# Altium PCB ZJ-20260608.PcbDoc
Units mm, origin at the board's own origin, x right, y up, seen from the top; angles counter-clockwise.
Board outline 152.4 x 101.6 mm, 2 copper layers (Top Layer, Bottom Layer); 58 components, 0 nets, 229 pads, 193 vias.
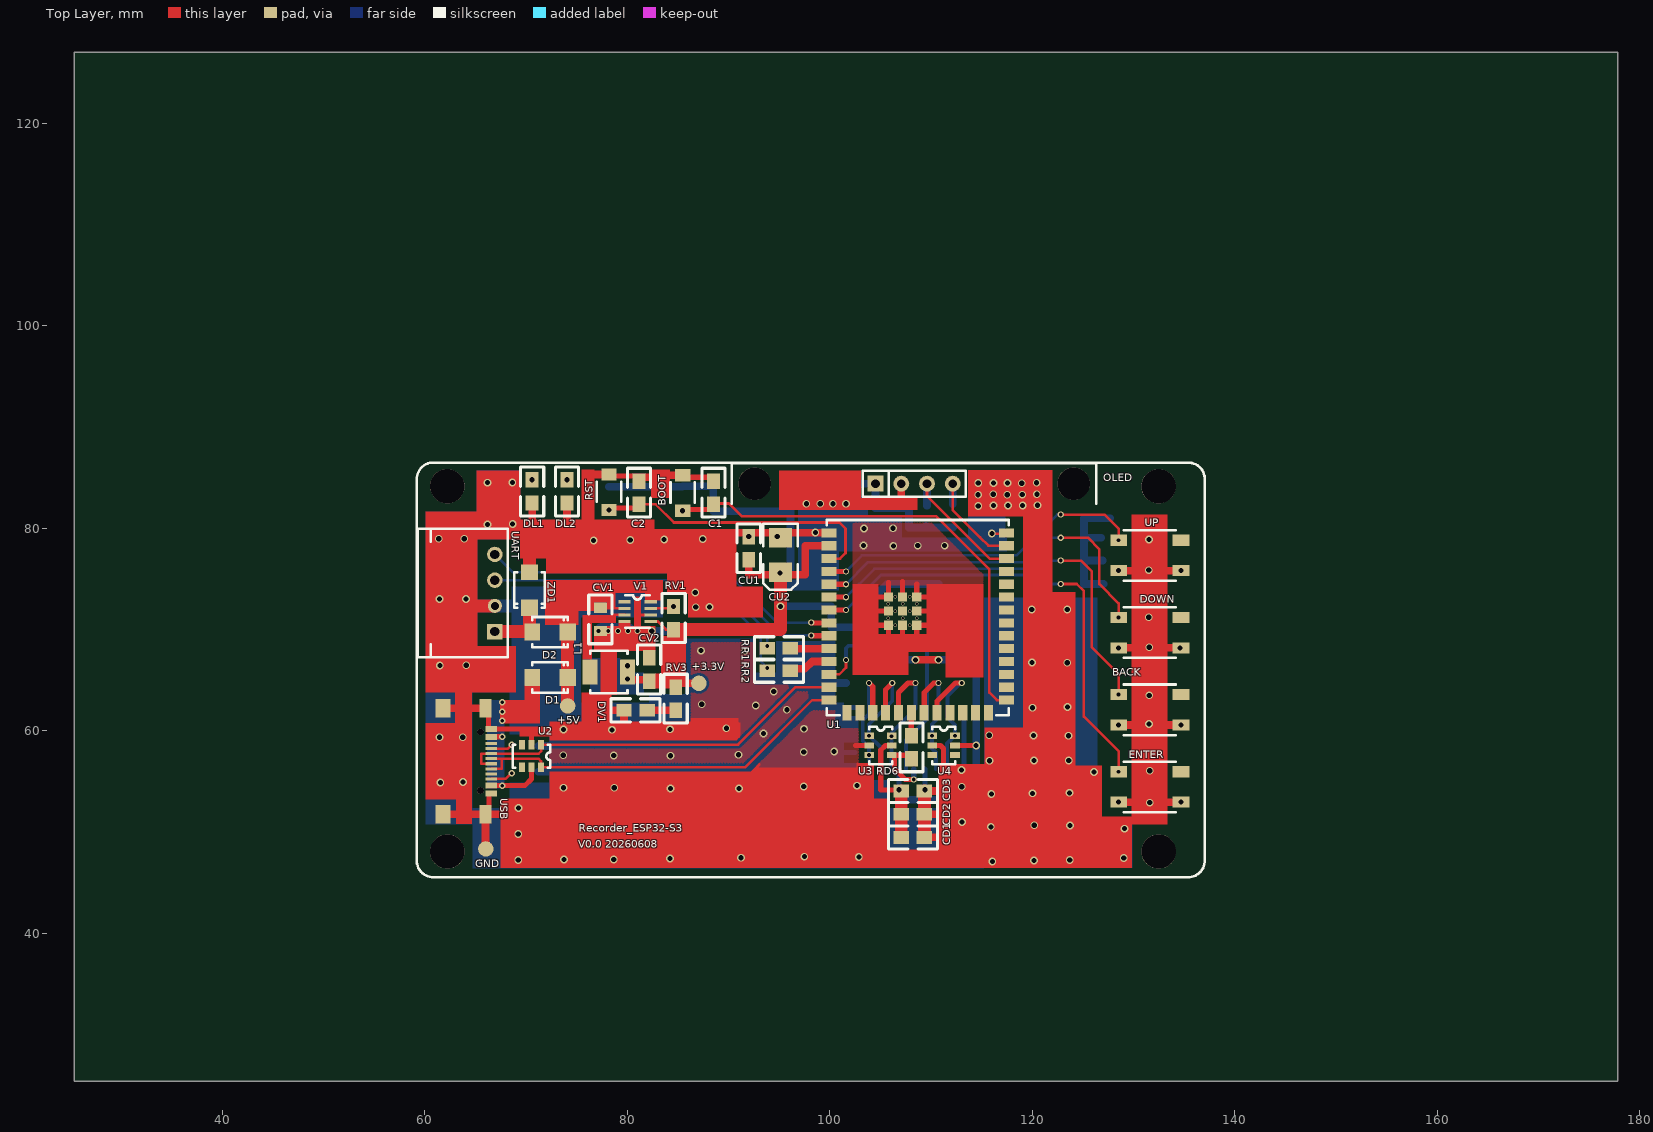
[diagram p0: Top Layer view]
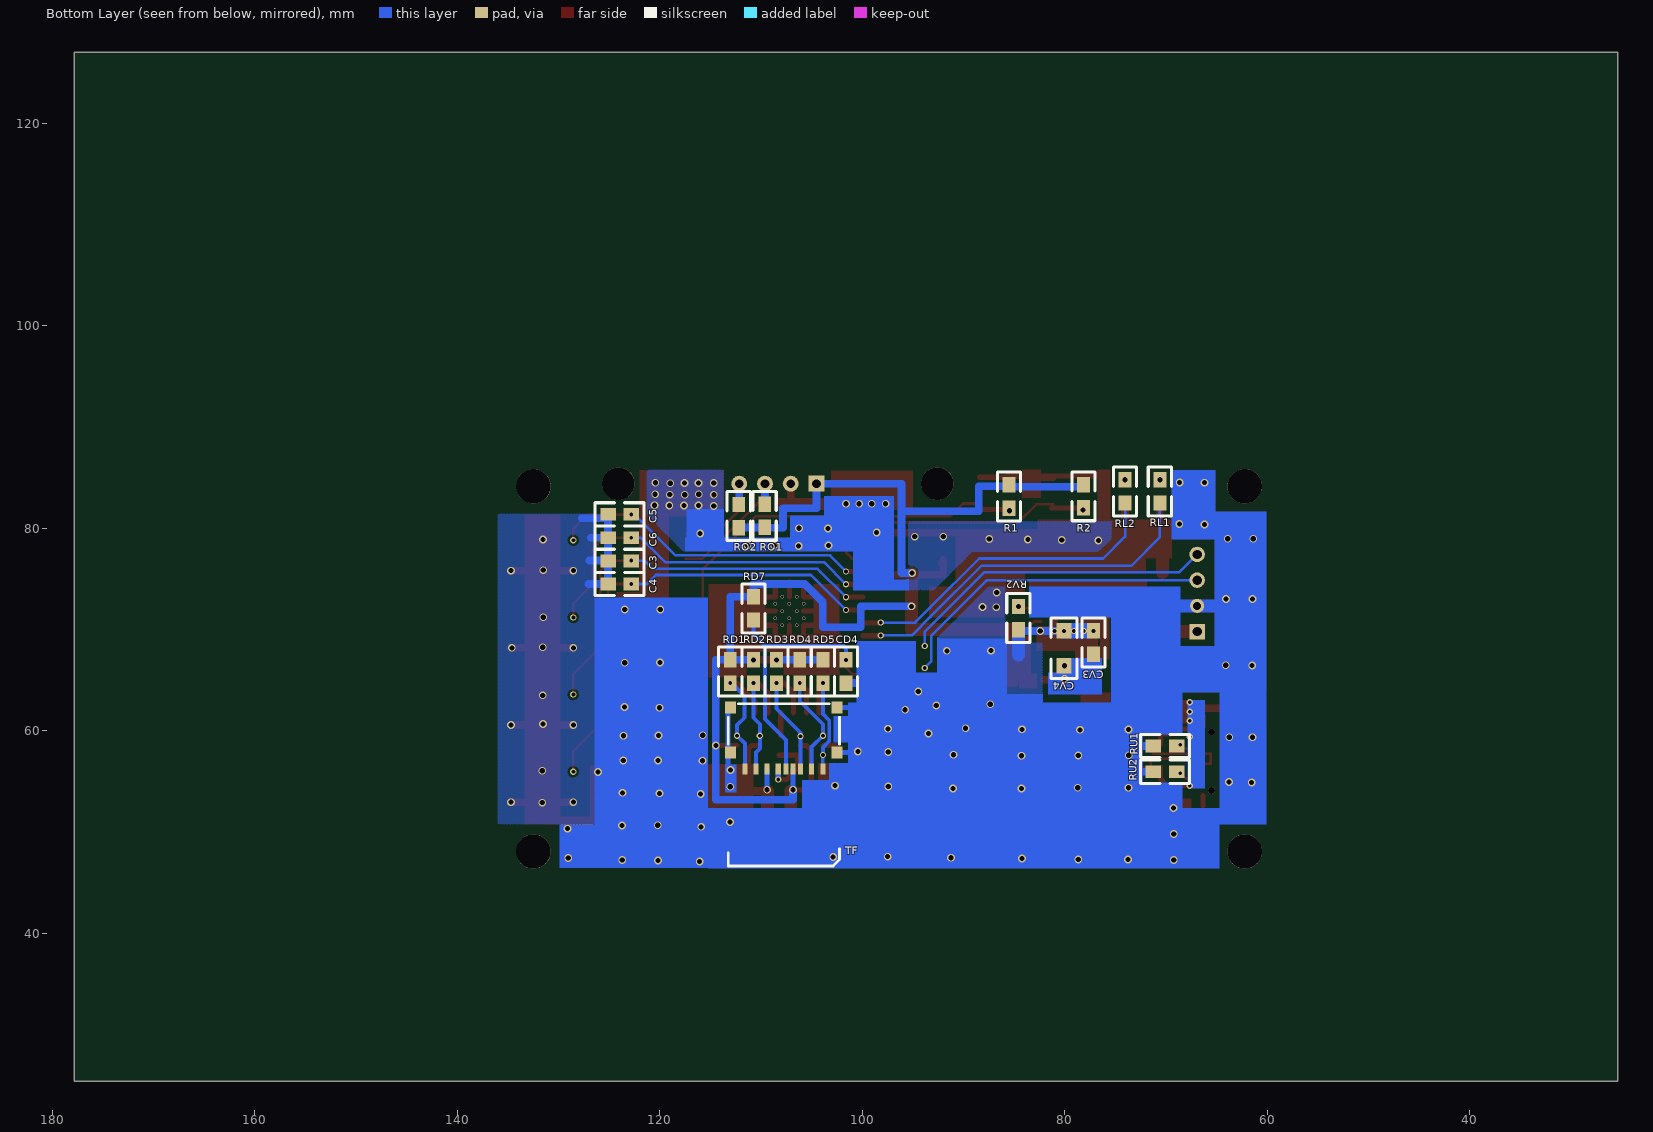
[diagram p1: Bottom Layer view, seen from below]

## Layer stack, top to bottom
Top Solder: solder mask 0.0102, Solder Resist, Dk 3.5
Top Layer: signal copper 0.0356
Dielectric 1: dielectric 0.32, FR-4, Dk 4.8
Bottom Layer: signal copper 0.0356
Bottom Solder: solder mask 0.0102, Solder Resist, Dk 3.5

## Board outline
25.4,25.4 177.8,25.4 177.8,127 25.4,127

## Design rules (kind name [scope] priority, off if disabled: settings)
Clearance [All] p1: gap=0.254
PolygonConnect [All] p1: connectstyle=Relief reliefconductorwidth=0.254 reliefentries=4 polygonreliefangle="90 Angle" airgapwidth=0.254
RoutingVias [All] p1: holewidth=0.711 width=1.27 viastyle="Through Hole" minholewidth=0.711 minwidth=1.27 maxholewidth=0.711 maxwidth=1.27
SolderMaskExpansion [All] p1: expansion=0.102
Width [All] p1: maxlimit=0.254 minlimit=0.254 preferedwidth=0.254
30 further rules are at their usual default settings.

## Components (designator, comment, footprint, x,y, rotation, side; value= is the part's Value field where it differs from the comment)
BACK "Comment" SW-4.5*4.5 128.524,63.576 r0 top
BOOT "Comment" SW-3*4 85.471,85.237 r270 top
C1 "Comment" 0805#1 88.519,84.658 r270 top
C2 "Comment" 0805#1 81.153,84.658 r270 top
C3 "Comment" 0805#1 125.095,76.784 r180 bottom
C4 "Comment" 0805#1 125.095,74.498 r180 bottom
C5 "Comment" 0805#1 125.095,81.382 r180 bottom
C6 "Comment" 0805#1 125.095,79.07 r180 bottom
CD1 "Comment" 0805#2 107.061,49.479 r0 top
CD2 "Comment" 0805#3 107.061,51.765 r0 top
CD3 "Comment" 0805#3 107.061,54.051 r0 top
CD4 "Comment" 0805#4 101.6,67.005 r270 bottom
CU1 "Comment" 0805#3 91.999,79.172 r270 top
CU2 "Comment" B-3528 95.123,75.65 r90 top
CV1 "Comment" 0805#5 77.343,69.866 r90 top
CV2 "Comment" 0805#3 82.169,64.913 r90 top
CV3 "Comment" 0805#3 77.156,67.58 r90 bottom
CV4 "Comment" 1206 80.077,66.437 r90 bottom
D1 "Comment" SMA#1 74.117,65.278 r180 top
D2 "Comment" SMA#1 74.117,69.743 r180 top
DL1 "Comment" 0805#4 70.612,84.785 r270 top
DL2 "Comment" 0805#4 74.041,84.785 r270 top
DOWN "Comment" SW-4.5*4.5 128.524,71.196 r0 top
DV1 "Comment" 0805#4 81.966,62.027 r180 top
ENTER "Comment" SW-4.5*4.5 128.524,55.956 r0 top
L1 "Comment" 0420 80.027,65.802 r180 top
OLED "Comment" OLED-1.3-IIC 108.329,84.404 r0 top
R1 "Comment" 0805#6 85.496,81.991 r90 bottom
R2 "Comment" 0805#6 78.156,82.017 r90 bottom
RD1 "Comment" 0805#3 113.03,67.005 r270 bottom
RD2 "Comment" 0805#3 110.744,67.005 r270 bottom
RD3 "Comment" 0805#3 108.458,67.005 r270 bottom
RD4 "Comment" 0805#3 106.172,67.005 r270 bottom
RD5 "Comment" 0805#3 103.886,67.005 r270 bottom
RD6 "Comment" 0805#3 108.077,59.512 r270 top
RD7 "Comment" 0805#7 110.744,73.228 r270 bottom
RL1 "Comment" 0805#3 70.612,84.785 r270 bottom
RL2 "Comment" 0805#3 74.041,84.785 r270 bottom
RO1 "Comment" 0805#3 109.626,82.372 r270 bottom
RO2 "Comment" 0805#3 112.192,82.347 r270 bottom
RR1 "Comment" 0805#3 96.114,68.148 r180 top
RR2 "Comment" 0805#3 96.114,65.938 r180 top
RST "Comment" SW-3*4 78.207,85.313 r270 top
RU1 "Comment" 0805#1 71.247,58.496 r180 bottom
RU2 "Comment" 0805#1 71.247,55.956 r180 bottom
RV1 "Comment" 0805#3 84.582,69.993 r90 top
RV2 "Comment" 0805#3 84.582,69.993 r90 bottom
RV3 "Comment" 0805#3 84.785,64.313 r270 top
TF "Comment" "TF Card" 107.739,57.856 r0 bottom
U1 "Comment" "ESP32-S3 module" 99.185,79.548 r0 top
U2 "Comment" "TSOP-6 SRV05-4" 71.496,58.638 r270 top
U3 "Comment" "TSOP-6 SRV05-4" 103.886,59.512 r0 top
U4 "Comment" "TSOP-6 SRV05-4" 110.109,59.512 r0 top
UART "Comment" XH2.54W-4P 66.929,69.799 r90 top
UP "Comment" SW-4.5*4.5 128.524,78.816 r0 top
USB "Comment" "TYPE-C USB T" 65.507,56.998 r270 top
V1 "Comment" TSOT23-8 81.026,71.771 r0 top
ZD1 "Comment" SMA#2 70.358,72.161 r90 top

## Footprints (in the part's own frame and the unit in brackets; to place one, negate y for a bottom-side part, rotate by r counter-clockwise, add the part's x,y. Pads: shape width x height; smd on the part's side, far side on the other; paste and mask are expansions set on the pad)
0420 [mm]
  rect 1.5x2.5 smd paste+0 mask+0.051: 1(0,0) 2(3.7,0)
  silkscreen extent 0,-2.1 3.7,2.1
0805#1 [mil]
  rect 60x50 smd: 2(90,0) GND(0,0)
  silkscreen extent -50,-45 140,45
0805#2 [mil]
  rect 60x50 smd: +3.3V(0,0) GND(90,0)
  silkscreen extent -50,-45 140,45
0805#3 [mil]
  rect 60x50 smd: 1(0,0) 2(90,0)
  silkscreen extent -50,-45 140,45
0805#4 [mil]
  rect 60x50 smd: 1(0,0) GND(90,0)
  silkscreen extent -50,-45 140,45
0805#5 [mil]
  rect 40x50 smd: 1(0,0) 2(90,0)
  silkscreen extent -50,-45 140,45
0805#6 [mil]
  rect 60x50 smd: 1(0,0) +3.3V(90,0)
  silkscreen extent -50,-45 140,45
0805#7 [mil]
  rect 60x50 smd: 2(90,0) +3.3V(0,0)
  silkscreen extent -50,-45 140,45
1206 [mil]
  rect 60x60 smd: 1(0,0) GND(135,0)
  silkscreen extent -50,-50 185,50
B-3528 [mm]
  rect 1.9x2.28 smd paste+0 mask+0.051: 1(0,0) 2(3.42,0)
  silkscreen extent -1.7,-1.7 4.8,1.7
"ESP32-S3 module" [mm]
  rect 1.5x0.9 smd paste+0 mask+0.051: 1(0.75,0) 2(0.75,-1.27) 3(0.75,-2.54) 4(0.75,-3.81) 5(0.75,-5.08) 6(0.75,-6.35) 7(0.75,-7.62) 8(0.75,-8.89) 9(0.75,-10.16) 10(0.75,-11.43) 11(0.75,-12.7) 12(0.75,-13.97) 13(0.75,-15.24) 14(0.75,-16.51) 27(18.25,-16.51) 28(18.25,-15.24) 29(18.25,-13.97) 30(18.25,-12.7) 31(18.25,-11.43) 32(18.25,-10.16) 33(18.25,-8.89) 34(18.25,-7.62) 35(18.25,-6.35) 36(18.25,-5.08) 37(18.25,-3.81) 38(18.25,-2.54) 39(18.25,-1.27) 40(18.25,0)
  rect 0.9x1.5 smd paste+0 mask+0.051: 15(2.515,-17.76) 16(3.785,-17.76) 17(5.055,-17.76) 18(6.325,-17.76) 19(7.595,-17.76) 20(8.865,-17.76) 21(10.135,-17.76) 22(11.405,-17.76) 23(12.675,-17.76) 24(13.945,-17.76) 25(15.215,-17.76) 26(16.485,-17.76)
  rect 0.9x0.9 smd paste+0 mask+0.051: ""(6.6,-9.12) ""(6.6,-7.72) ""(6.6,-6.32) ""(8,-9.12) ""(8,-7.72) ""(8,-6.32) ""(9.4,-9.12) ""(9.4,-7.72) ""(9.4,-6.32)
  silkscreen extent 0.5,-18.01 18.5,1.27
OLED-1.3-IIC [mil]
  round 125.98 hole 125.98: 2(-620.08,0) 2(620.08,0)
  round 62 hole 34: GND(-50,0) SCL(50,0) SDA(150,0)
  rect 62x62 hole 34: VCC(-150,0)
  silkscreen extent -709,-79 709,79
SMA#1 [mm]
  rect 1.6x1.68 smd paste+0 mask+0.051: 1(0,0)
  rect 1.52x1.68 smd paste+0 mask+0.051: 2(3.48,0)
  silkscreen extent 0,-1.5 3.48,1.5
SMA#2 [mm]
  rect 1.6x1.68 smd paste+0 mask+0.051: 1(0,0)
  rect 1.52x1.68 smd paste+0 mask+0.051: GND(3.48,0)
  silkscreen extent 0,-1.5 3.48,1.5
SW-3*4 [mm]
  rect 1.2x1.5 smd paste+0 mask+0.051: 1(0,0) 2(3.5,0)
  silkscreen extent 0.7,-1.2 2.7,1.2
SW-4.5*4.5 [mm]
  rect 1.65x1.1 smd paste+0 mask+0.051: 1(0,0) 2(6.15,0) 3(0,-3) 4(6.15,-3)
  silkscreen extent 0.5,-4 5.65,1
"TF Card" [mm]
  rect 1.1x1.2 smd paste+0 mask+0.051: G(-5.25,-4.45) G(-5.25,0) G(5.25,-4.45) G(5.25,0)
  rect 0.5x1.08 smd paste+0 mask+0.051: G(-0.2,1.64) P1(-3.85,1.64) P2(-2.75,1.64) P3(-1.65,1.64) P4(-0.9,1.64) P5(0.55,1.64) P6(1.65,1.64) P7(2.75,1.64) P8(3.85,1.64)
  silkscreen extent -5.5,-4.8 5.5,11.2
"TSOP-6 SRV05-4" [mm]
  rect 0.95x0.6 smd paste+0 mask+0.051: 1(0,0) 2(0,-0.95) 3(0,-1.9) 4(2.25,-1.9) 5(2.25,-0.95) 6(2.25,0)
  silkscreen extent 0,-2.79 2.29,0.89
TSOT23-8 [mm]
  rect 1.2x0.3 smd paste+0 mask+0.051: 1(-1.3,0.975) 2(-1.3,0.325) 3(-1.3,-0.325) 4(-1.3,-0.975) 5(1.3,-0.975) 6(1.3,-0.325) 7(1.3,0.325) 8(1.3,0.975)
  silkscreen extent -1.2,-1.6 1.2,1.6
"TYPE-C USB T" [mm]
  round 0.65 hole 0.65: 0(-2.89,0) 0(2.89,0)
  rect 1.8x1.2 smd paste+0 mask+0.051: 1(-5.225,0.5) 1(5.225,0.5)
  rect 1.8x1.5 smd paste+0 mask+0.051: 1(-5.225,-3.7) 1(5.225,-3.7)
  rect 0.6x1.15 smd paste+0 mask+0.051: 1(-3.2,1.05) 2(-2.4,1.05) 11(2.4,1.05) 12(3.2,1.05)
  rect 0.3x1.15 smd paste+0 mask+0.051: 3(-1.75,1.05) 4(-1.25,1.05) 5(-0.75,1.05) 6(-0.25,1.05) 7(0.25,1.05) 8(0.75,1.05) 9(1.25,1.05) 10(1.75,1.05)
  silkscreen extent -3.5,-6.28 3.5,-6.28
XH2.54W-4P [mil]
  round 55.12 hole 31.5: GND(100,0)
  round 60 hole 36: RXD(300,0) TXD(200,0)
  rect 60x60 hole 36: VCC(0,0)
  silkscreen extent -100,-50 400,300

## Free pads (board coordinates)
  round 3.4 hole 3.4: 2(62.23,48.082) 2(62.23,84.15) 2(132.461,48.082) 2(132.461,84.15)
  round 1.524 smd: +3.3V(87.071,64.694) +5V(74.117,62.459) GND(66.04,48.336)

## Via types
v1: diameter 0.762, hole 0.508, Top Layer to Bottom Layer, 141 vias
v2: diameter 0.61, hole 0.381, Top Layer to Bottom Layer, 33 vias
v3: diameter 0.35, hole 0.25, Top Layer to Bottom Layer, 12 vias
v4: diameter 0.635, hole 0.356, Top Layer to Bottom Layer, 7 vias

## Nets (pads, with @x,y where several pads share a name; then routed paths per layer and width w, separated by ;. In a path a pad name is that pad's centre, name@x,y a point inside that pad or via, vN(x,y) a via of type N, cw(c..) or ccw(c..) an arc to the next point about the centre after c; other vN are vias at no path point)
pads on no net: BACK.1 BACK.2 BACK.3 BACK.4 BOOT.1 BOOT.2 C1.2 C1.GND C2.2 C2.GND C3.2 C3.GND C4.2 C4.GND C5.2 C5.GND C6.2 C6.GND CD1.+3.3V CD1.GND CD2.1 CD2.2 CD3.1 CD3.2 CD4.1 CD4.GND CU1.1 CU1.2 CU2.1 CU2.2 CV1.1 CV1.2 CV2.1 CV2.2 CV3.1 CV3.2 CV4.1 CV4.GND D1.1 D1.2 D2.1 D2.2 DL1.1 DL1.GND DL2.1 DL2.GND DOWN.1 DOWN.2 DOWN.3 DOWN.4 DV1.1 DV1.GND ENTER.1 ENTER.2 ENTER.3 ENTER.4 L1.1 L1.2 OLED.2 OLED.GND OLED.SCL OLED.SDA OLED.VCC R1.1 R1.+3.3V R2.1 R2.+3.3V RD1.1 RD1.2 RD2.1 RD2.2 RD3.1 RD3.2 RD4.1 RD4.2 RD5.1 RD5.2 RD6.1 RD6.2 RD7.2 RD7.+3.3V RL1.1 RL1.2 RL2.1 RL2.2 RO1.1 RO1.2 RO2.1 RO2.2 RR1.1 RR1.2 RR2.1 RR2.2 RST.1 RST.2 RU1.2 RU1.GND RU2.2 RU2.GND RV1.1 RV1.2 RV2.1 RV2.2 RV3.1 RV3.2 TF.G TF.P1 TF.P2 TF.P3 TF.P4 TF.P5 TF.P6 TF.P7 TF.P8 U1. U1.1 U1.2 U1.3 U1.4 U1.5 U1.6 U1.7 U1.8 U1.9 U1.10 U1.11 U1.12 U1.13 U1.14 U1.15 U1.16 U1.17 U1.18 U1.19 U1.20 U1.21 U1.22 U1.23 U1.24 U1.25 U1.26 U1.27 U1.28 U1.29 U1.30 U1.31 U1.32 U1.33 U1.34 U1.35 U1.36 U1.37 U1.38 U1.39 U1.40 U2.1 U2.2 U2.3 U2.4 U2.5 U2.6 U3.1 U3.2 U3.3 U3.4 U3.5 U3.6 U4.1 U4.2 U4.3 U4.4 U4.5 U4.6 UART.GND UART.RXD UART.TXD UART.VCC UP.1 UP.2 UP.3 UP.4 USB.0 USB.1 USB.2 USB.3 USB.4 USB.5 USB.6 USB.7 USB.8 USB.9 USB.10 USB.11 USB.12 V1.1 V1.2 V1.3 V1.4 V1.5 V1.6 V1.7 V1.8 ZD1.1 ZD1.GND
copper on no net: | length 934.8
  Top Layer w0.254: 66.557,55.248 67.998,55.248 v4(68.58,55.829) ; 66.557,56.248 67.615,56.248 67.615,57.248 ; 66.557,56.748 65.583,56.748 65.583,57.748 66.557,57.748 71.26,57.748 71.496,57.983 71.496,58.638 90.947,58.638 96.617,64.308 99.935,64.308 ; 66.557,57.248 67.615,57.248 ; 66.557,58.248 68.204,58.248 v4(68.58,58.623) ; 77.668,72.096 79.726,72.096 ; 78.257,71.12 78.583,71.446 79.726,71.446 ; 81.153,82.372 82.804,82.372 84.607,80.569 100.94,80.569 101.549,79.959 101.549,77.546 101.011,77.008 99.935,77.008 ; 82.326,70.796 83.017,70.796 83.82,69.993 84.963,69.993 ; 82.326,72.096 v1@84.653,72.096 ; 88.595,82.448 90.043,82.448 91.288,81.204 110.465,81.204 115.748,75.921 115.748,63.779 116.489,63.038 117.435,63.038 ; 89.84,59.182 90.754,59.182 91.008,59.436 ; 92.075,55.702 93.053,56.68 ; 96.114,68.377 96.372,68.118 ; 96.368,66.396 96.647,66.116 ; 99.935,63.038 98.268,63.038 91.618,56.388 71.496,56.388 71.496,56.977 71.226,57.248 67.615,57.248 ; 99.935,65.578 100.935,65.578 101.6,66.243 v2(101.6,67.005) ; 102.743,55.702 102.743,56.753 ; 109.599,84.404 109.599,83.187 114.122,78.664 115.778,77.008 117.435,77.008 ; 112.139,84.404 112.139,81.79 114.833,79.096 115.651,78.278 117.435,78.278 ; v1@114.437,58.562 v1(114.452,58.547) ; v1(116.002,79.477) 117.363,79.477 ; v2(122.809,74.498) 124.384,74.498 125.095,73.787 125.095,61.417 128.524,57.988 v2(128.524,55.956) ; v2(122.809,76.81) 124.816,76.81 125.857,75.768 125.857,68.275 128.524,65.608 v2(128.524,63.576) ; v2(122.809,79.07) 125.476,79.07 126.619,77.927 126.619,74.498 128.524,72.593 v2(128.524,71.196) ; v2(122.809,81.356) 127.127,81.356 128.524,79.959 v2(128.524,78.816)
  Top Layer w0.508: 66.294,60.452 66.294,61.468 ; 66.345,52.578 66.345,53.594 ; 66.557,60.198 69.927,60.198 ; 66.57,54.585 v4(67.64,54.585) 69.875,54.585 70.546,55.255 70.546,56.388 ; 66.57,59.411 v4(67.64,59.411) ; 70.546,58.638 70.546,59.578 ; 78.359,85.166 81.153,85.166 ; v1@78.486,81.991 81.28,81.991 ; 85.598,85.039 88.392,85.039 ; v1@85.725,81.864 88.519,81.864 ; v2@98.201,69.388 99.935,69.388 ; v2@98.201,70.658 99.935,70.658 ; 99.935,71.928 v2(101.6,71.928) ; 99.935,73.198 v2(101.6,73.198) ; 99.935,74.468 v2(101.6,74.468) ; 99.935,75.738 v2(101.6,75.738) ; 102.54,58.562 103.886,58.562 ; v2(103.886,64.719) 104.24,64.365 104.24,61.788 ; 104.49,70.428 105.785,70.428 105.785,69.297 ; 104.623,73.228 105.785,73.228 105.785,74.631 ; 104.651,71.828 105.785,71.828 ; 105.51,61.788 105.51,64.057 v2(106.172,64.719) ; 106.136,58.562 105.501,58.562 105.029,58.09 105.029,54.153 v1@106.959,54.153 ; 106.78,61.788 106.78,63.778 107.721,64.719 v2(108.458,64.719) ; 107.185,69.269 107.185,70.428 ; 107.185,73.228 107.185,74.728 ; 108.05,59.539 108.05,61.788 ; 108.229,57.582 106.39,57.582 106.39,56.246 107.442,55.194 v2(108.289,55.194) ; 108.585,69.291 108.585,70.428 109.824,70.428 ; 108.585,71.828 109.909,71.828 ; 108.585,74.483 108.585,73.228 109.804,73.228 ; 109.32,61.788 109.32,63.778 110.261,64.719 v2(110.744,64.719) ; 110.109,58.562 110.932,58.562 111.227,58.268 111.227,56.312 ; 110.59,61.788 110.59,62.914 112.395,64.719 v2(113.03,64.719) ; 112.359,58.562 v1@114.437,58.562
  Top Layer w0.762: 61.807,51.773 63.457,51.773 ; 61.807,62.223 63.518,62.223 ; 64.041,62.223 66.007,62.223 ; 64.178,51.773 66.007,51.773 ; 66.007,48.37 66.007,51.773 ; 67.76,51.773 66.007,51.773 ; 70.612,80.264 70.612,82.499 ; 74.041,80.391 74.041,82.499 ; 76.434,85.313 78.207,85.313 ; 77.978,62.027 79.68,62.027 79.68,60.401 ; v1@80.264,65.04 82.042,65.04 ; 81.178,85.039 83.439,85.039 ; 81.966,62.027 84.785,62.027 ; 83.165,85.237 85.471,85.237 ; 84.938,64.694 87.071,64.694 ; 89.941,79.553 91.999,79.553 ; v1@91.948,79.548 99.935,79.548 ; 91.999,76.886 91.999,75.413 94.885,75.413 97.587,75.413 97.587,78.278 99.935,78.278 ; 92.075,76.606 92.177,76.606 ; 96.114,68.118 99.935,68.118 ; 96.647,66.116 97.536,66.116 98.268,66.848 99.935,66.848 ; 107.059,82.527 107.059,84.404 ; v1(108.458,67.005) v1(110.744,67.005) ; 109.347,49.479 111.328,49.479 ; 109.347,51.765 111.252,51.765 ; v1@109.347,54.051 110.769,54.051 ; v1(128.524,52.956) 130.223,52.956 ; v1(128.524,60.576) 130.33,60.576 ; v1(128.524,68.196) 130.152,68.196 ; v1(128.524,75.816) 130.686,75.816 ; 132.788,52.956 v1(134.674,52.956) ; 132.972,68.196 v1@134.674,68.196 ; 132.972,75.816 v1(134.674,75.816) ; 133.023,60.576 v1(134.674,60.576)
  Top Layer w1.27: 64.11,72.339 66.929,72.339 ; 66.929,69.799 70.358,69.799 ; 70.358,69.819 70.358,72.161 ; 70.358,75.641 70.358,77.495 ; 74.117,62.459 74.117,65.278 74.117,69.743 ; 84.582,69.993 95.123,69.993 v1@95.123,75.523 ; 107.061,49.479 v1@107.061,54.051 ; 109.347,49.479 v1@109.347,54.051
  Bottom Layer w0.254: 66.929,74.879 87.681,74.879 93.193,69.367 93.193,66.853 v2(93.828,66.218) ; 66.929,77.419 68.707,75.641 87.96,75.641 93.828,69.774 v2(93.828,68.377) ; 70.612,82.499 70.612,79.121 73.431,76.302 88.214,76.302 93.243,71.272 95.098,69.418 v2(98.171,69.418) ; 74.041,82.499 74.041,79.172 76.2,77.013 88.443,77.013 93.345,72.111 94.767,70.688 v2(98.171,70.688) ; 79.629,66.751 v1@80.01,66.37 ; 92.507,68.707 92.507,69.113 ; v2(101.6,71.928) 105.059,75.387 120.371,75.387 121.26,74.498 v2(122.809,74.498) ; v2(101.6,73.198) 104.399,75.997 120.675,75.997 121.463,76.784 v2@122.809,76.784 ; v2(101.6,74.468) 103.789,76.657 119.456,76.657 121.869,79.07 v2(122.809,79.07) ; v2(101.6,75.738) 103.179,77.318 118.415,77.318 122.479,81.382 v2@122.809,81.382 ; v2@112.903,64.719 v2(113.03,64.719)
  Bottom Layer w0.381: v2(101.6,67.005) 101.6,68.148 101.854,68.402 109.601,68.402 ; v2(103.886,57.612) 103.886,58.369 103.251,59.004 103.251,61.036 103.886,61.671 v2(103.886,64.719) ; 103.889,56.216 v2@103.889,57.612 ; 104.989,56.216 104.989,58.409 v2(103.886,59.512) 103.886,60.655 106.172,62.941 v2(106.172,64.719) ; 106.089,56.216 v2(106.089,59.465) 106.089,59.81 108.458,62.179 v2(108.458,64.719) ; 107.539,56.216 107.539,59.101 109.601,61.163 109.601,68.402 ; 110.489,56.216 110.489,57.862 110.109,58.242 v2(110.109,59.512) 110.109,60.655 110.744,61.29 v2(110.744,64.719) ; 110.744,70.942 110.744,69.545 109.601,68.402 ; 111.589,56.216 111.589,58.742 v2(112.359,59.512) 112.359,60.564 111.633,61.29 111.633,63.449 v2@112.903,64.719
  Bottom Layer w0.508: v4(67.64,54.585) v4(67.64,59.411) v4(67.64,62.814) ; 101.194,62.306 102.489,62.306 ; 101.417,57.856 102.489,57.856 ; v1(106.839,54.178) 106.839,56.216 ; v2(108.289,55.194) 108.289,56.216 ; v1(109.389,54.178) 109.389,56.216 ; v1@113.268,56.185 113.268,62.281
  Bottom Layer w0.762: 71.247,55.956 73.152,55.956 ; 71.247,58.496 73.05,58.496 ; 78.207,84.099 85.42,84.099 ; v2(80.077,69.866) v1(82.423,69.866) 84.455,69.866 ; 85.471,84.15 88.494,84.15 88.494,81.686 96.114,81.686 96.114,84.404 104.519,84.404 104.519,81.989 107.821,81.989 107.821,80.061 109.343,80.061 109.497,80.215 ; v1(95.072,75.59) 96.114,75.59 96.114,81.991 ; v1(95.123,72.288) 100.152,72.288 100.152,70.231 103.886,70.231 103.886,72.72 105.664,74.498 110.744,74.498 110.744,73.228 113.03,73.228 113.03,67.005 ; 100.076,64.719 101.6,64.719 ; 103.886,67.005 v1(108.458,67.005) ; v1(106.839,54.178) 106.839,53.206 114.452,53.206 114.452,67.005 113.03,67.005 ; 109.599,82.222 109.599,84.404 ; 109.626,80.086 112.166,80.086 ; v1(110.744,67.005) 113.03,67.005 ; 112.139,82.4 112.139,84.404 ; 125.095,79.07 126.784,79.07 ; 125.12,76.81 126.95,76.81 ; 127.025,74.498 125.095,74.498 125.095,81.003 127.662,81.003
  Bottom Layer w1.27: 64.465,72.339 66.929,72.339 69.418,72.339 ; 84.582,67.499 84.582,69.993
  Bottom Layer w1.524: 77.47,69.866 v2(80.077,69.866)
  other v1: 116.053,47.092 120.167,47.193 69.24,47.244 123.698,47.244 73.762,47.295 78.664,47.295 84.226,47.396 129.032,47.447 91.237,47.473 102.87,47.549 97.485,47.574 69.24,49.809 129.108,50.343 115.9,50.521 123.723,50.648 120.193,50.673 113.055,51.003 69.266,52.375 131.597,52.908 115.951,53.772 120.015,53.823 123.673,53.873 84.277,54.305 91.034,54.305 73.711,54.381 78.715,54.381 113.03,54.483 97.434,54.508 102.692,54.585 61.544,54.889 63.779,54.94 126.086,55.931 131.597,56.058 113.005,56.134 115.773,57.048 120.167,57.074 123.596,57.074 84.277,57.541 78.671,57.556 73.685,57.582 90.983,57.637 97.434,57.912 100.432,57.963 61.468,59.36 63.754,59.36 123.571,59.512 120.117,59.538 115.748,59.563 93.447,59.736 78.486,60.096 73.711,60.122 84.226,60.147 97.46,60.198 89.789,60.249 131.521,60.681 95.758,62.078 120.015,62.281 123.469,62.357 92.685,62.509 87.351,62.626 131.547,63.5 94.463,63.892 80.035,65.126 80.035,66.421 61.493,66.446 64.11,66.472 123.444,66.726 119.964,66.751 91.643,67.894 87.274,67.92 134.595,68.196 131.547,68.25 131.496,71.222 119.939,71.984 123.444,71.984 86.766,72.212 88.129,72.238 84.582,72.279 61.468,73.025 64.084,73.025 86.716,73.651 131.496,75.87 106.274,78.257 108.687,78.283 111.341,78.283 103.327,78.304 76.683,78.799 80.289,78.842 83.642,78.892 131.521,78.892 87.452,78.943 61.392,78.969 63.906,78.969 91.999,79.172 94.818,79.172 98.577,79.578 103.378,79.978 106.248,80.01 66.192,80.366 68.682,80.416 85.471,81.737 78.207,81.813 114.656,82.207 116.154,82.245 117.602,82.245 119.039,82.245 120.502,82.271 97.688,82.423 99.06,82.423 100.305,82.423 101.6,82.423 114.646,83.312 117.526,83.318 118.999,83.323 116.134,83.363 120.447,83.365 118.948,84.453 114.656,84.471 116.154,84.48 117.554,84.48 120.421,84.489 66.192,84.506 68.656,84.531 70.612,84.785 74.041,84.785
  other v2: 77.156,69.866 78.13,69.866 79.096,69.866 81.026,69.866
  other v3: 106.485,70.428 107.885,70.428 105.785,71.128 107.185,71.128 108.585,71.128 106.485,71.828 107.885,71.828 105.785,72.528 107.185,72.528 108.585,72.528 106.485,73.228 107.885,73.228
  other v4: 67.64,60.985 67.64,61.874

## Polygon pours and split planes (outlines as drawn)
no net on Bottom Layer "Bottom Layer-No Net" (hatched 45Degree grid 0.203 track 0.254, pour order 18): 85.979,68.656 85.979,74.117 87.503,74.117 92.71,68.91 92.71,68.529 85.979,68.529 85.979,68.656
no net on Bottom Layer "Bottom Layer-No Net" (hatched 45Degree grid 0.203 track 0.254, pour order 20): 126.492,81.356 135.89,81.356 135.89,50.876 126.492,50.876 126.492,81.356
no net on Bottom Layer "Bottom Layer-No Net" (hatched 45Degree grid 0.203 track 0.254, pour order 22): 75.438,80.594 75.438,79.324 75.438,79.07 76.708,77.8 89.154,77.8 92.964,73.99 95.504,73.99 95.504,80.594 75.438,80.594
no net on Bottom Layer "Bottom Layer-No Net" (hatched 45Degree grid 0.203 track 0.254, pour order 24): 121.158,85.42 121.158,82.118 121.158,81.356 118.872,79.07 117.602,77.8 117.348,77.8 117.348,81.864 113.792,81.864 113.792,85.674 121.158,85.674 121.158,85.42
no net on Bottom Layer "Bottom Layer-No Net" (hatched 45Degree grid 0.203 track 0.254, pour order 26): 85.725,68.596 85.725,63.643 82.296,63.643 82.296,68.596 85.725,68.596
no net on Top Layer "Bottom Layer-No Net" (hatched 45Degree grid 0.203 track 0.254, pour order 28): 102.362,74.498 102.362,80.467 109.982,80.467 115.062,75.387 115.062,74.498 102.362,74.498
no net on Top Layer "Bottom Layer-No Net" (hatched 45Degree grid 0.203 track 0.254, pour order 30): 92.202,55.829 98.298,61.925 100.457,61.925 100.457,60.147 102.743,60.147 102.743,55.829 92.202,55.829
no net on Top Layer "Bottom Layer-No Net" (hatched 45Degree grid 0.203 track 0.254, pour order 32): 86.36,60.909 86.36,62.941 86.36,68.656 92.456,68.656 92.456,64.338 92.583,64.465 96.139,64.465 96.037,64.465 90.627,59.055 88.773,60.909 86.36,60.909
no net on Top Layer "Bottom Layer-No Net" (hatched 45Degree grid 0.203 track 0.254, pour order 34): 72.39,58.638 90.947,58.638 96.617,64.308 97.79,64.308 97.79,62.56 91.618,56.388 72.39,56.388 72.39,58.638

## Other copper
Top Layer:
  rectangle: 76.505,70.637 78.867,71.45
  rectangle: 75.59,67.031 76.505,71.45
  rectangle: 69.342,59.461 72.441,60.452
  rectangle: 75.489,60.757 78.435,63.805
  rectangle: 104.673,65.507 107.772,67.97
  rectangle: 111.43,65.253 115.189,67.92
  rectangle: 104.699,67.767 109.753,69.571
  rectangle: 109.568,67.767 115.189,74.498
  rectangle: 102.235,65.507 104.8,74.498
  rectangle: 102.684,56.007 104.369,56.82
  rectangle: 92.558,55.956 92.812,56.261
  rectangle: 92.761,55.702 102.743,56.388
  rectangle: 90.551,59.309 90.881,59.436
  rectangle: 90.551,59.436 91.169,60.833
  rectangle: 86.233,60.824 91.008,61.29
  rectangle: 71.958,75.54 83.972,77.064
  rectangle: 86.004,71.196 93.421,74.27
  rectangle: 83.922,73.508 90.78,77.064
  rectangle: 72.339,59.055 90.627,60.909
  rectangle: 72.339,53.238 104.369,56.007
  rectangle: 82.321,83.007 84.226,85.801
  rectangle: 75.463,80.721 76.784,85.801
  rectangle: 69.342,79.883 82.702,80.848
  rectangle: 69.418,77.038 90.78,79.934
  rectangle: 67.462,46.431 105.715,53.315
  rectangle: 105.664,46.431 110.744,48.26
  rectangle: 110.744,46.431 119.101,56.718
  rectangle: 113.665,81.153 119.151,85.776
  rectangle: 124.282,51.486 126.873,56.566
  rectangle: 124.282,46.431 129.845,51.537
  rectangle: 121.945,46.431 124.282,73.711
  rectangle: 119.101,46.431 121.971,85.776
  rectangle: 129.794,50.749 133.35,81.356
  rectangle: 102.997,81.788 108.636,82.982
  rectangle: 94.971,81.788 103.073,85.7
  rectangle: 69.875,62.992 71.399,64.491
  rectangle: 65.126,78.892 69.444,85.725
  rectangle: 65.024,63.805 69.012,68.377
  rectangle: 67.437,60.706 71.399,63.068
  region: 75.692,72.72 75.692,71.831 76.708,71.831 76.708,72.72
  region: 71.882,71.831 71.882,70.434 75.184,70.434 75.184,71.831
  region: 71.882,74.879 71.882,71.831 75.692,71.831 75.692,74.879
  region: 75.692,74.879 75.692,73.609 83.541,73.609 83.541,74.879
  region: 75.692,73.803 75.692,72.66 77.978,72.66 77.978,73.803
  region: 80.645,73.254 80.645,70.231 81.382,70.231 81.382,73.254
  region: 77.927,70.358 77.927,67.869 82.804,67.869 82.804,70.358
  region: 77.953,70.358 77.953,69.19 79.273,69.19 79.273,70.358
  region: 76.708,69.393 76.708,67.869 77.927,67.869 77.927,69.393
  region: 77.343,67.92 77.343,63.551 78.994,63.551 78.994,67.92
  region: 79.121,70.663 79.121,70.333 80.315,70.333 80.315,70.663
  region: 81.305,71.603 81.305,71.298 81.737,71.298 81.737,71.603
  region: 77.927,73.66 77.927,72.187 78.842,72.187 78.842,73.66
  region: 81.763,73.685 81.763,72.847 83.541,72.847 83.541,73.685
  region: 83.337,69.367 83.337,64.922 85.801,64.922 85.801,69.367
  region: 82.753,65.684 82.753,64.16 84.506,64.16 84.506,65.684
  region: 60.096,81.636 60.096,63.805 65.202,63.805 65.202,81.636
  region: 60.096,60.782 60.096,53.213 64.694,53.213 64.694,60.782
  region: 62.992,64.008 62.992,60.782 64.694,60.782 64.694,64.008
  region: 63.094,53.213 63.094,50.8 64.694,50.8 64.694,53.213
  rectangle: 115.291,56.718 119.101,60.325
Bottom Layer:
  rectangle: 113.665,78.939 117.348,81.883
  rectangle: 107.086,77.699 117.493,79.07
  rectangle: 103.708,77.699 107.112,81.28
  rectangle: 100.914,77.699 103.759,83.21
  rectangle: 85.852,68.707 92.507,69.113
  rectangle: 101.397,58.826 102.819,61.468
  rectangle: 85.725,65.71 92.634,68.732
  rectangle: 68.351,52.375 72.771,54.889
  rectangle: 68.351,59.614 75.413,63.805
  rectangle: 82.169,62.713 85.801,63.643
  rectangle: 85.725,62.738 94.666,65.742
  rectangle: 94.666,62.738 100.559,68.859
  rectangle: 103.302,52.324 105.943,55.169
  rectangle: 101.397,52.324 103.302,56.82
  rectangle: 72.263,52.375 101.397,62.814
  rectangle: 112.42,53.899 113.563,56.693
  rectangle: 64.719,46.406 115.214,52.375
  rectangle: 126.289,46.457 129.87,50.775
  rectangle: 115.214,46.431 126.416,73.177
  rectangle: 95.36,73.863 100.914,74.955
  rectangle: 96.85,74.955 100.914,83.21
  rectangle: 65.126,78.892 69.444,85.75
  rectangle: 75.413,71.171 83.515,74.244
  rectangle: 68.555,68.377 75.413,74.244
  rectangle: 65.176,63.805 75.413,68.377
  rectangle: 60.096,50.775 64.719,63.805
  rectangle: 60.096,63.805 65.227,81.636
  rectangle: 66.167,54.305 67.437,63.068
  region: 76.327,65.735 76.327,63.576 81.661,63.576 81.661,65.735
  region: 76.327,67.183 76.327,65.735 79.35,65.735 79.35,67.183

## Silkscreen, mask and mechanical layers (free items; w line width, h text height)
Top Overlay:
  lines w0.254: 59.208,47.267 ccw(c60.857,47.192) 60.909,45.542 ; 59.21,47.265 59.21,84.786 cw(c60.86,84.837) 60.935,86.487 ; 60.757,86.488 135.331,86.488 cw(c135.383,84.838) 137.033,84.763 ; 60.933,45.542 135.306,45.542 ccw(c135.381,47.192) 137.031,47.244 ; 137.033,47.269 137.033,84.763
  text "+3.3V" at 86.36,65.96 h0.76
  text "+5V" at 73.101,60.706 h0.76
  text "Recorder_ESP32-S3" at 75.235,50.038 h0.76
  text "V0.0 20260608" at 75.184,48.463 h0.76
  text "GND" at 64.999,46.533 h0.76